# Altium PCB Smart_Umbrella.PcbDoc
Units mil, origin at the board's own origin, x right, y up, seen from the top; angles counter-clockwise.
Board outline 1377.95 x 2165.35 mil, 2 copper layers (Top Layer, Bottom Layer); 50 components, 39 nets, 170 pads, 17 vias.
Unrouted connection lines stored in the file: 1.
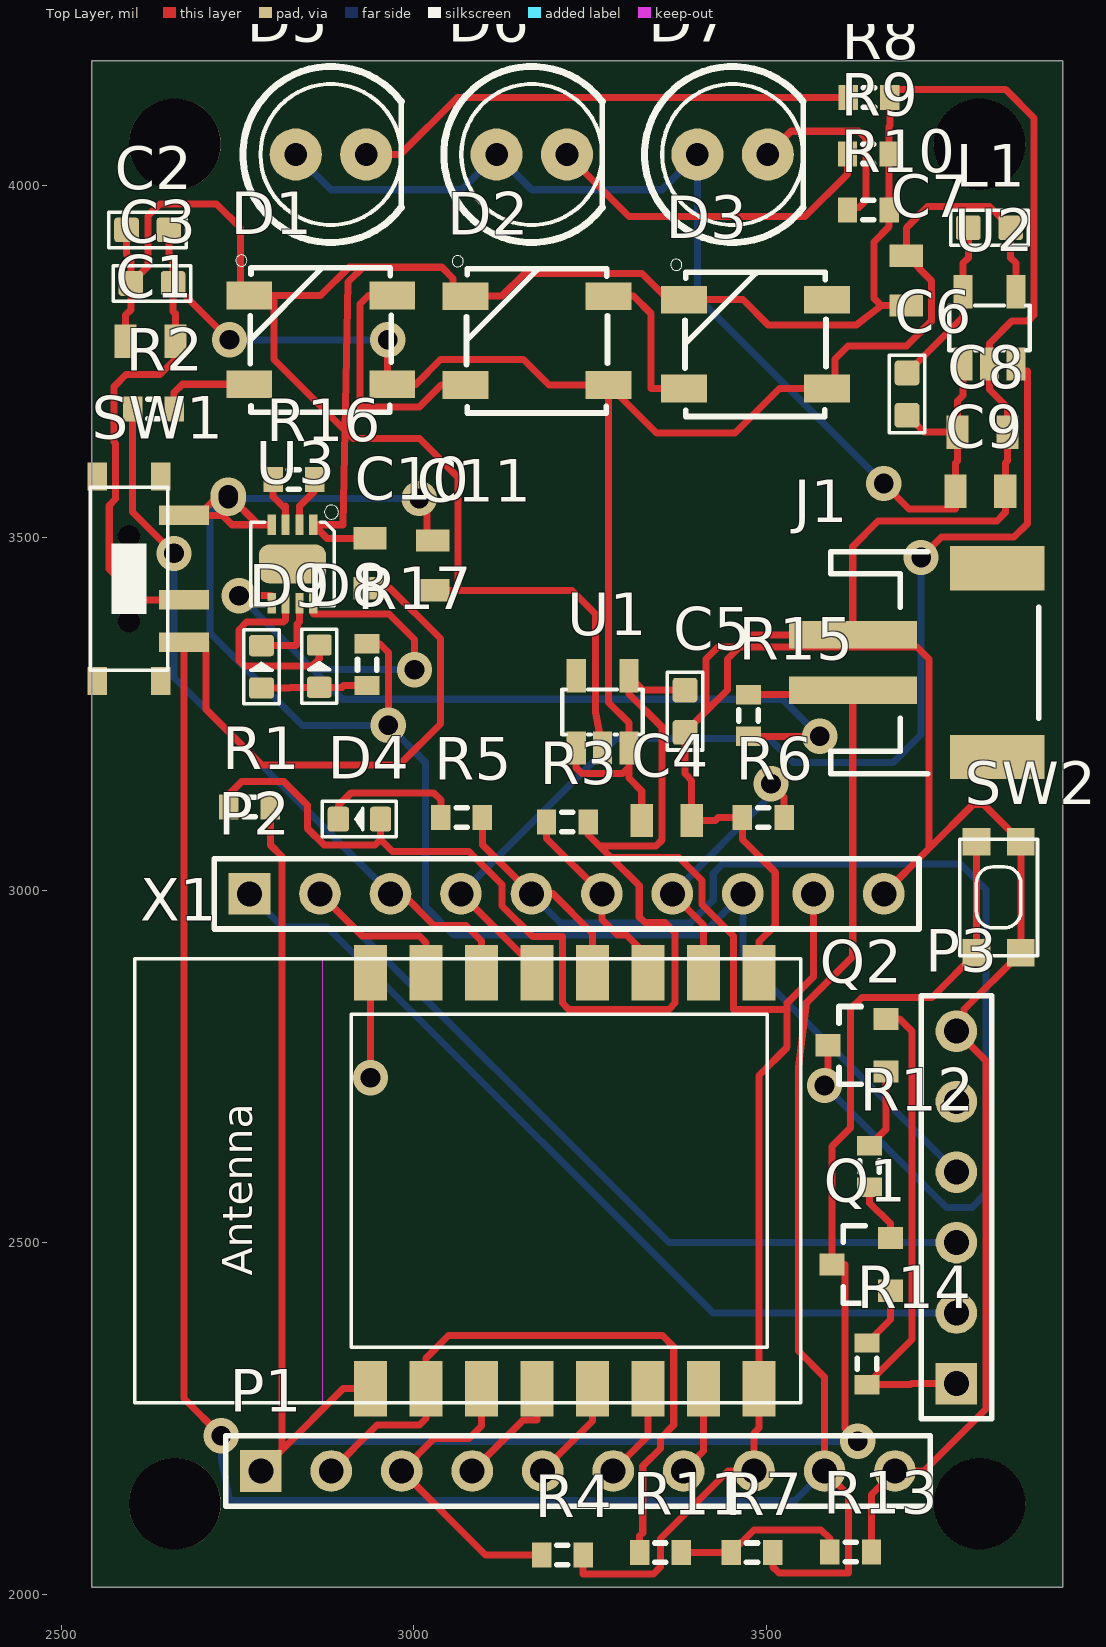
[diagram p0: Top Layer view]
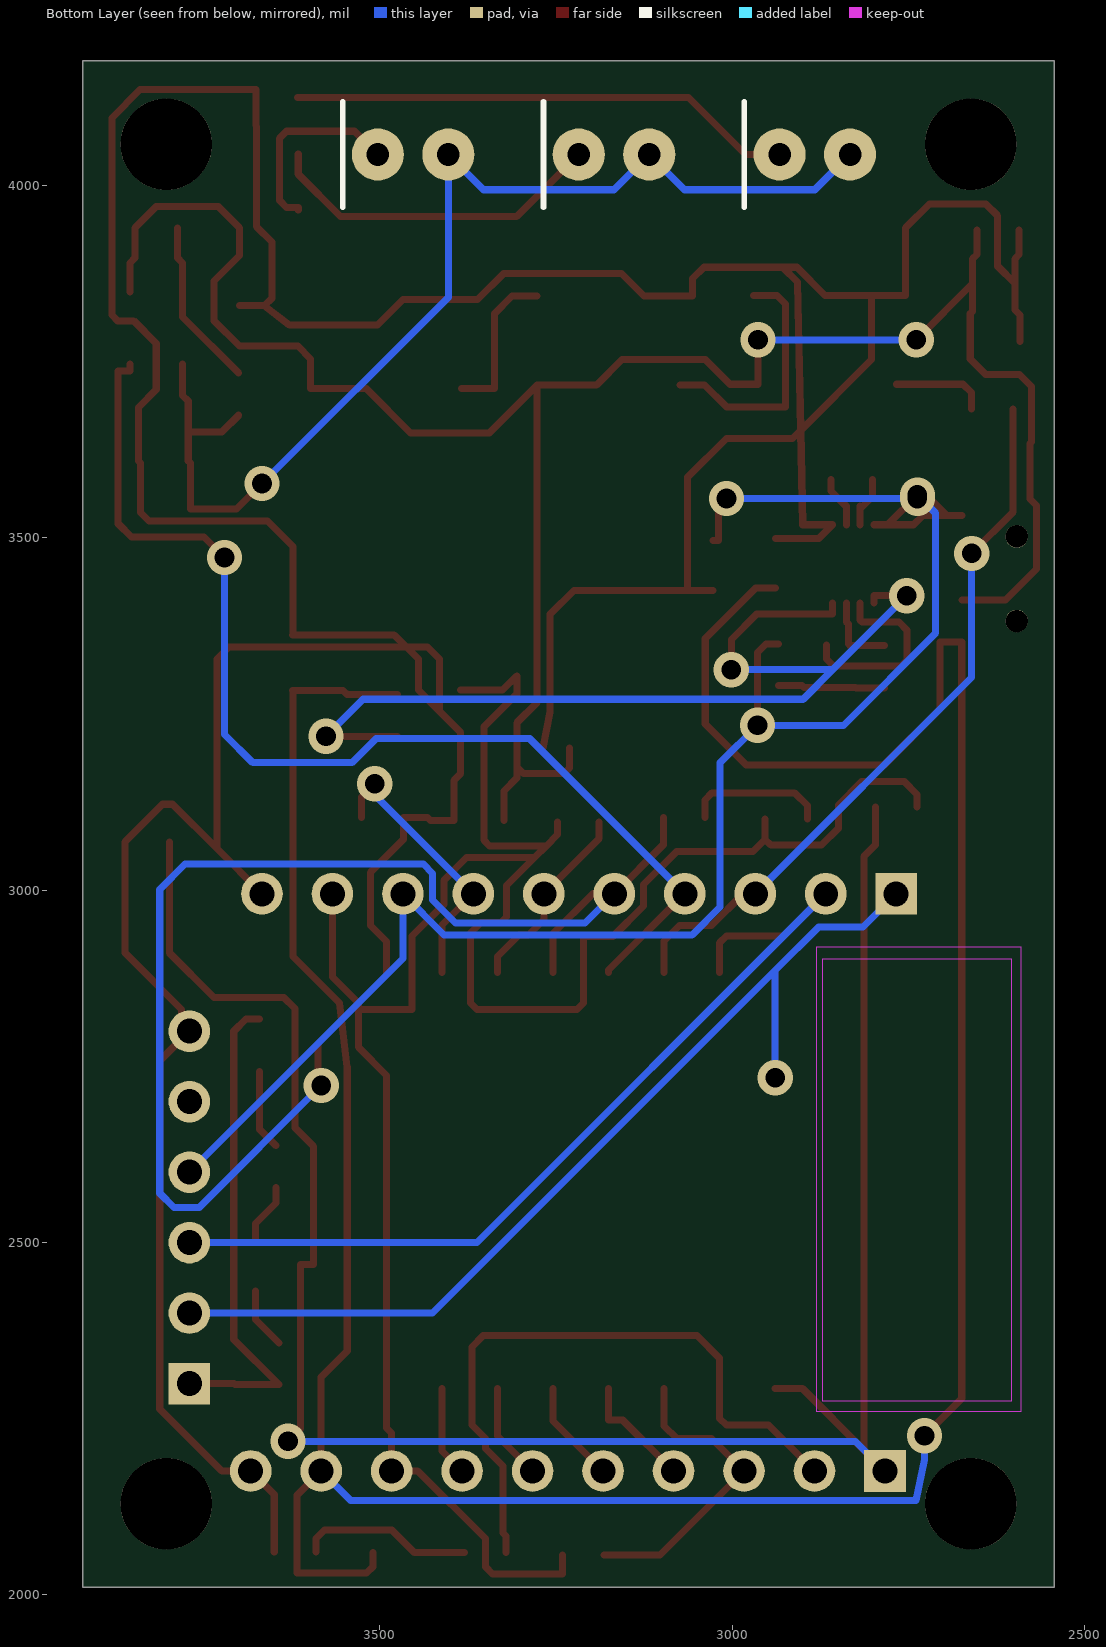
[diagram p1: Bottom Layer view, seen from below]

## Layer stack, top to bottom
Top Solder: solder mask 0.4, Solder Resist, Dk 3.5
Top Layer: signal copper 1.4
Dielectric 1: dielectric 12.6, FR-4, Dk 4.8
Bottom Layer: signal copper 1.4
Bottom Solder: solder mask 0.4, Solder Resist, Dk 3.5

## Board outline
2543,4176.68 2543,2011.32 3920.95,2011.32 3920.95,4176.68

## Design rules (kind name [scope] priority, off if disabled: settings)
Clearance "Schematic Clearance Constraint" [InComponent('U3')] p1: gap=10 except(7: Track-SMDPad SMDPad-SMDPad)
Clearance [All] p2: gap=7
PasteMaskExpansion [All] p1 off: expansion=0
PolygonConnect [All] p1: connectstyle=Relief reliefconductorwidth=10 reliefentries=4 polygonreliefangle="90 Angle" airgapwidth=10
RoomDefinition Smart_Umbrella [InComponentClass('Smart_Umbrella')] p1: confinementstyle=ConfineIn formatcopy=TRUE lockcomponents=FALSE outline 2446,1891 4025,1891 4025,4318 2446,4318
RoutingVias [All] p1: holewidth=28 width=50 viastyle="Through Hole" minholewidth=28 minwidth=50 maxholewidth=28 maxwidth=50
SolderMaskExpansion [All] p1 off: expansion=4
Width [All] p1: maxlimit=10 minlimit=8 preferedwidth=10
29 further rules are at their usual default settings.

## Components (designator, comment, footprint, x,y, rotation, side; value= is the part's Value field where it differs from the comment)
C1 "10µF" 0805 2626.57,3779 r180 top
C2 "1µF" C0603 2622.57,3937 r90 top
C3 "1µF" C0603 2628.57,3861 r90 top
C4 "0.1µF" 0805 3359,3099 r0 top
C5 "1µF" C0603 3385,3254 r180 top
C6 "2.2nF" C0603 3700,3704 r180 top
C7 "4.7µF" 0805 3699,3865 r270 top
C8 "22µF" 0805 3807,3650 r0 top
C9 "22µF" 0805 3804,3566 r0 top
C10 "4.7µF" 0805 2938,3464 r90 top
C11 "22µF" 0805 3027,3461 r270 top
D1 "WS2812B5050" WS2812B 2868,3781 r0 top
D2 "WS2812B5050" WS2812B 3175,3780 r0 top
D3 "WS2812B5050" WS2812B 3485,3775 r0 top
D4 "Red" LED-0603 2923,3101 r180 top
D5 "LED" LED_5MM 2882.54,4043.99 r0 top
D6 "LED" LED_5MM 3167.54,4043.99 r0 top
D7 "LED" LED_5MM 3452.54,4043.99 r0 top
D8 "Yellow" LED-0603 2866,3318 r90 top
D9 "Green" LED-0603 2784,3317 r90 top
J1 "JSTPH" JST-2-SMD 3769,3323 r270 top
L1 "6.8µH" L0603 3817,3940 r180 top
P1 "Header 10" HDR1X10 2783,2176 r0 top
P2 "Header 10" HDR1X10 2767,2995 r0 top
P3 "Header 6" HDR1X6 3770,2300 r90 top
Q1 "MMBT3904L" SOT23-3 3637,2469 r90 top
Q2 "MMBT3904L" SOT23-3 3631,2780 r90 top
R1 "Res3" J1-0603 2767,3118 r180 top
R2 "Res3" J1-0603 2630.57,3683 r0 top
R3 "Res3" J1-0603 3218,3097 r0 top
R4 "Res3" J1-0603 3211,2057 r0 top
R5 "Res3" J1-0603 3068,3103 r180 top
R6 "Res3" J1-0603 3496,3103 r0 top
R7 "Res3" J1-0603 3480,2060 r0 top
R8 "Res3" J1-0603 3646.04,4125 r180 top
R9 "Res3" J1-0603 3645,4045 r180 top
R10 "Res3" J1-0603 3645,3965 r180 top
R11 "Res3" J1-0603 3350,2060 r180 top
R12 "Res3" J1-0603 3647,2608 r90 top
R13 "Res3" J1-0603 3620,2061 r0 top
R14 "Res3" J1-0603 3643,2328 r90 top
R15 "Res3" J1-0603 3475,3248 r90 top
R16 "Res3" J1-0603 2830,3583 r0 top
R17 "Res3" J1-0603 2934,3320 r270 top
SW1 "MK-12C02" SW7-SMD-L6.7X2.7X3.2MM 2596,3442 r0 top
SW2 "DHT-4235A" KMR2 3830,2990 r270 top
U1 "XC6204B332MR" SOT-23-5 3268,3253 r0 top
U2 "ETA1036-50S2F" SOT-23-5 3817,3798 r0 top
U3 "CN3065" DFN8G-0.5-3X3MM 2828,3463 r180 top
X1 "ESP-12" ESP-12 3116,2588 r90 top

## Footprints (in the part's own frame and the unit in brackets; to place one, negate y for a bottom-side part, rotate by r counter-clockwise, add the part's x,y. Pads: shape width x height; smd on the part's side, far side on the other; paste and mask are expansions set on the pad)
0805 [mil]
  rect 31.5x47.24 smd: 1(-35.43,0) 2(35.43,0)
C0603 [mil]
  rrect25% 35x35 smd: 1(0,30) 2(0,-30)
  silkscreen extent -25,-55 25,55
DFN8G-0.5-3X3MM [mil]
  rect 11.81x28.62 smd: 1(-29.53,-55.65) 2(-9.84,-55.65) 3(9.84,-55.65) 4(29.53,-55.65) 5(29.53,55.65) 6(9.84,55.65) 7(-9.84,55.65) 8(-29.53,55.65)
  rrect50% 95x55 smd: HEAT(0,0)
  silkscreen extent -65,-84 59,59
ESP-12 [mm]
  rect 2x1.2 smd: 1(-7.5,4.5) 2(-7.5,2.5) 3(-7.5,0.5) 4(-7.5,-1.5) 5(-7.5,-3.5) 6(-7.5,-5.5) 7(-7.5,-7.5) 8(-7.5,-9.5) 9(7.5,-9.5) 10(7.5,-7.5) 11(7.5,-5.5) 12(7.5,-3.5) 13(7.5,-1.5) 14(7.5,0.5) 15(7.5,2.5) 16(7.5,4.5)
  Mechanical 8 keep-out region: -8,6 8,6 8,13 -8,13
  Mechanical 9 keep-out region: -8,6 8,6 8,13 -8,13
  silkscreen extent -8,-11 8,13
HDR1X6 [mm] "Connector; Header; 6 Position"
  rect 1.5x1.5 hole 0.9: 1(0,0)
  round 1.5 hole 0.9: 2(2.54,0) 3(5.08,0) 4(7.62,0) 5(10.16,0) 6(12.7,0)
  silkscreen extent -1.27,-1.27 13.97,1.27
HDR1X10 [mm] "Connector; Header; 10 Position"
  rect 1.5x1.5 hole 0.9: 1(0,0)
  round 1.5 hole 0.9: 2(2.54,0) 3(5.08,0) 4(7.62,0) 5(10.16,0) 6(12.7,0) 7(15.24,0) 8(17.78,0) 9(20.32,0) 10(22.86,0)
  silkscreen extent -1.27,-1.27 24.13,1.27
J1-0603 [mm] "Chip Resistor, Body 1.6x0.8mm, IPC High Density"
  rect 0.7x0.9 smd: 1(-0.75,0) 2(0.75,0)
  silkscreen extent -0.2,-0.35 0.2,0.35, body extent -0.85,-0.48 0.85,0.48, height 0.9
JST-2-SMD [mm]
  rect 1x4.6 smd: 1(-1,-3.7) 2(1,-3.7)
  rect 1.6x3.4 smd: NC1(-3.4,1.5) NC2(3.4,1.5)
  silkscreen extent -4,-4.5 4,3
KMR2 [mm]
  rect 1x1 smd: 1(2,0.8) 2(2,-0.8) 3(-2,0.8) 4(-2,-0.8)
  silkscreen extent -2.1,-1.4 2.1,1.4
L0603 [mil]
  rrect25% 35x35 smd: 1(-30,0) 2(30,0)
  silkscreen extent -55,-25 55,25
LED-0603 [mil]
  rrect25% 30x35 smd: +(-30,0) -(30,0)
  silkscreen extent -52,-25 52,25
LED_5MM [mil]
  round 74 hole 32: A(-50,0) K(50,0)
  silkscreen extent -125,-125 100,125
SOT23-3 [mil]
  rect 31.5x35.43 smd: 1(-37.4,-39.37) 2(37.4,-39.37) 3(0,43.31)
  silkscreen extent -55,-4 55,28, body extent -59,-29 59,29, height 35
SOT-23-5 [mil]
  rect 27.17x47.24 smd: 1(-37.4,-51.19) 2(0,-51.19) 3(37.4,-51.19) 4(37.4,51.19) 5(-37.4,51.19)
  silkscreen extent -57,-32 57,32
SW7-SMD-L6.7X2.7X3.2MM [mil]
  round 32 hole 32: 1(0,-60) 1(0,60)
  rect 70.87x27.56 smd: A(77.87,90) B(77.87,-90) COM(77.87,-30)
  rect 27.56x40 smd: SS1(-45.28,-145) SS2(45.28,-145) SS3(45.28,145) SS4(-45.28,145)
  silkscreen extent -55,-130 55,130
WS2812B [mil]
  rect 65x39.37 smd: 1(101.46,-62.99) 2(101.46,62.99) 3(-101.46,62.99) 4(-101.46,-62.99)
  silkscreen extent -120,-103 100,120

## Part data
C1 C4 C7 C8 C9 C10 C11: library part 10UF-0805-10V-10%
C2 C3 C5: library part CERAMIC-1UF-25V-10%-X7R(0603)
C6: library part CERAMIC-2.2NF-50V-10%-X7R(0603)
D4: library part LED-0603
D5 D6 D7: library part LED5MM
D8: library part SMD-LED-CLEAR-YELLOW(0603)
D9: library part SMD-LED-CLEAR-GREEN(0603)
J1: library part JST_2MM_MALE
L1: library part INDUCTOR/FERRITE-BEAD-0603
P1 P2: "Header, 10-Pin"
P3: "Header, 6-Pin"
Q1 Q2: library part TRANSISTOR_NPNSOT23-3, "Transistor NPNBJT configuration in SOT23 package. MMBT2222 is the common NPN we use. Double check BCE configuration again layout."
R1 R2 R3 R4 R5 R6 R7 R8 R9 R10 R11 R12 R13 R14 R15 R16 R17: "Resistor"
SW1: library part SMD-TOGGLE-SWITCH-ON-ON(3+4P-6.7X2.7MM)
SW2: library part SPST_TACT-KMR2
U1: library part PMIC-LDO-XC6204B332MR(SOT23-5)
U2: library part PMIC-ETA1036-50S2F-T(SOT23-5)
U3: library part PMIC-CN3065(DFN8)

## Free pads (board coordinates)
  round 129.92 hole 129.92: 1(2661.11,2129.43) 1(2661.11,4058.57) 1(3802.84,2129.43) 1(3802.84,4058.57)

## Via types
v1: diameter 50, hole 28, Top Layer to Bottom Layer, 17 vias

## Nets (pads, with @x,y where several pads share a name; then routed paths per layer and width w, separated by ;. In a path a pad name is that pad's centre, name@x,y a point inside that pad or via, vN(x,y) a via of type N, cw(c..) or ccw(c..) an arc to the next point about the centre after c; other vN are vias at no path point)
3.3V: C5.2 D4.+ P1.8 P2.9 R1.2 R3.2 R4.2 U1.4 X1.8 | length 3308.9
  Top Layer w10: R1.2 2737.47,3136 2755.47,3154 2816,3154 2849,3121 2849,3088 2873,3064 2945,3064 2953,3072 ; D4.+ 2953,3072 ; R4.2 3240.53,2030 3340,2030 3350,2040 3350,2080 3446,2176 P1.8 3483,2230 3490.02,2237.02 X1.8 3490.02,2737.32 3530,2777.3 3530,2831 ; R3.2 3247.53,3078.94 3263.47,3063 ; C5.2 3325.59,3284 U1.4 3305.4,3278.6 3352,3232 3352,3071 3344,3063 3263.47,3063 ; P2.9 3567,2877 3530,2840 3530,2831 ; 2953,3072 2970,3055 3078.47,3055 3125.47,3008 3125.47,2977.8 3168.62,2934.65 3211,2934.65 3211,2840 3220,2831 3362,2831 3371,2840 3371,2939.5 3356.5,2954 3328,2954 3320,2962 3320,3006.47 3280.09,3046.38 ; 3263.47,3063 3280.09,3046.38 ; 3280.09,3046.38 3376.62,3046.38 3409,3014 3409,2980 3454,2935 3454,2831 3530,2831
ADC: P1.2 R11.2 X1.2 | length 934.3
  Top Layer w10: P1.2 2948,2241 3008,2241 3017.57,2250.57 X1.2 3017.57,2336 3049.57,2368 3353,2368 3369,2352 3369,2241 3350,2222 3350,2208 3325,2183 3325,2088 3320.47,2083.47 R11.2
CH_PD: P1.3 R4.1 X1.3 | length 440.3
  Top Layer w10: X1.3 3096.31,2240 3078.31,2222 3029,2222 P1.3 3102,2057 R4.1
CTS: P3.5
DTR: P3.1 Q2.2 R14.1 | length 699.5
  Top Layer w10: Q2.2 3689.6,2817.4 3707,2800 3707,2362.47 R14.1 3705,2298.47 3706.53,2300 P3.1
GND: C1.2 C2.1 C3.1 C4.2 C5.1 C7.2 C8.2 C9.2 C10.2 C11.2 D1.3 D2.3 D3.3 J1.1 P1.10 P2.10 P3.6 R6.1 R8.1 R9.1 R10.1 R13.2 R16.1 SW2.1 SW2.3 U1.2 U2.2 U3.1 U3.3 X1.9 | length 7552
  Top Layer w10: C1.2 2591.14,3816 2598.57,3823.43 C3.1 ; C2.1 2592.57,3902 2598.57,3896 C3.1 ; R16.1 2800.47,3558.69 2818.16,3541 ; U3.3 2818.16,3541 ; 2818.16,3545 2818.16,3541 ; C10.2 2876.75,3499.43 U3.1 2899.65,3518.65 2902.51,3652.49 ; C11.2 3063,3425.57 ; U1.2 3258,3253 3258,3392 3224.43,3425.57 3063,3425.57 ; X1.9 3490.02,2927.02 3513,2950 3513,3025.47 3466.47,3072 R6.1 3432,3103 3428,3099 C4.2 3394.43,3156 3385,3165.43 C5.1 3415,3254 ; J1.1 J1.1@3623,3362.37 ; R13.2 3649.53,2142.53 P1.10 3724,2176 3812,2264 3812,2758 P3.6 3781,2800 3781,2830.76 SW2.1 SW2.3 3808.24,3122 3794,3122 3731,3059 ; P2.10 3731,3059 ; C7.2 3663.43,3829.57 ; C3.1 2623,3885.43 2623,3957 2640,3974 2720,3974 2754,3940 2754,3843.99 D1.3 2802.02,3843.99 ; 2802.02,3843.99 2868,3843.99 2908.01,3884 2928,3884 ; 2802.02,3843.99 2802.02,3752.98 2902.51,3652.49 ; 2902.51,3652.49 2914,3641 3008,3641 3063,3586 3063,3425.57 ; 2902.51,3652.49 2907,3863 2928,3884 ; 2928,3884 3040,3884 3056,3868 3056,3842.99 D2.3 3124.99,3842.99 3157,3875 3323.99,3875 3361,3837.99 D3.3 3467,3837.99 3502.99,3802 3628,3802 3663.43,3829.57 ; 3415,3254 3415,3328 3432,3345 3462,3345 ; 3415,3254 3445,3284 3445,3328 3462,3345 ; 3462,3345 3479.37,3362.37 J1.1@3623,3362.37 ; 3462,3345 3714,3345 3731,3328 3731,3059 ; J1.1@3623,3362.37 3623,3488 3659,3524 3827.43,3524 3839.43,3536 C9.2 3839.43,3606 3842.43,3609 C8.2 3842.43,3685 3817,3710.43 U2.2 3817,3776 3849,3808 3872,3808 3880,3816 3880,4096 3840,4136 3675.57,4136 R8.1 3675.57,4085.04 3674.53,4084 R9.1 R10.1 3674.53,3941.53 3653,3920 3653,3840 3663.43,3829.57
GPIO0: P2.5 Q2.3 R5.1 X1.12 | length 1835.1
  Top Layer w10: R5.1 3097.53,3064.47 P2.5 3197.39,2995 3253.8,2938.59 X1.12 ; v1(3583,2723) 3587.69,2727.69 Q2.3
  Bottom Layer w10: P2.5 3208.53,2953.47 3392.47,2953.47 3425,2986 3425,3024 3438,3037 3776,3037 3812,3001 3812,2570 3792,2550 3756,2550 v1(3583,2723)
GPIO2: P2.6 R3.1 X1.11 | length 281.1
  Top Layer w10: R3.1 3188.47,3073.53 P2.6 3267,2958.39 3288.92,2936.47 3302.07,2936.47 3332.54,2906 X1.11
GPIO4/SDA: P2.4 U2.3 X1.13 | length 1596.6
  Top Layer w10: P2.4 3175.06,2886.94 X1.13 ; v1(3720,3472) 3749,3501 3852,3501 3871,3520 3871,3737 3854.4,3737 U2.3
  Bottom Layer w10: P2.4 3287,3215 3505,3215 3539,3181 3680,3181 3720,3221 v1(3720,3472)
GPIO5/SCL: P2.3 R2.1 X1.14 | length 1041.4
  Top Layer w10: R2.1 2601.04,3536.96 v1(2660,3478) ; P2.3 2984,2995 3029,2950 3074.31,2950 3096.31,2928 X1.14
  Bottom Layer w10: v1(2660,3478) 2660,3302 P2.3
GPIO12/MISO: P1.6 X1.6 | length 137.2
  Top Layer w10: P1.6 3332.54,2225.54 X1.6
GPIO13/MOSI: P1.7 X1.7 | length 128.4
  Top Layer w10: P1.7 3411.28,2204.28 X1.7
GPIO14/SCK: P1.5 X1.5 | length 146
  Top Layer w10: P1.5 3253.8,2246.8 X1.5
GPIO15: P2.7 R6.2 X1.10 | length 399.7
  Top Layer w10: P2.7 3411.28,2950.72 X1.10 ; v1(3507,3151) 3525.53,3132.47 R6.2
  Bottom Layer w10: P2.7 3507,3135 v1(3507,3151)
GPIO16: P1.4 X1.4 | length 166.6
  Top Layer w10: P1.4 3155,2248 3175.06,2248 X1.4
NetC6_1: C6.1 C8.1 C9.1 D5.A D6.A D7.A U2.1 | length 1637.7
  Top Layer w10: v1(3667,3577) 3703,3541 3768.57,3541 C9.1 3768.57,3606 3771.57,3609 C8.1 ; C6.1 3724,3650 C8.1 ; U2.1 3779.6,3702.03 3771.57,3694 C8.1
  Bottom Layer w10: D5.A 2882.53,3994 3067.55,3994 D6.A 3167.53,3994 3352.55,3994 D7.A 3402.54,3841.46 v1(3667,3577)
NetC6_2: C6.2 L1.2 U2.5 | length 242
  Top Layer w10: C6.2 3779.6,3813.6 U2.5 3779.6,3890 3787,3897.4 L1.2
NetD1_2: D1.2 D2.4 | length 358.8
  Top Layer w10: D1.2 2935.99,3843.99 2924,3832 2924,3686 3008,3686 3039.01,3717.01 D2.4
NetD1_4: D1.4 R2.2 | length 134.5
  Top Layer w10: R2.2 2660.1,3706.11 2672,3718.01 D1.4
NetD2_2: D2.2 D3.4 | length 223.4
  Top Layer w10: D2.2 3312,3842.99 3336.99,3818 3336.99,3712.01 D3.4
NetD4_-: D4.- R5.2 | length 201.3
  Top Layer w10: D4.- 2893,3120 2911.3,3138.3 3028.17,3138.3 3038.47,3128 R5.2
NetD5_K: D5.K R8.2 | length 717.5
  Top Layer w10: D5.K 2980.99,4043.99 3062,4125 R8.2
NetD6_K: D6.K R9.2 | length 488.2
  Top Layer w10: D6.K 3305.53,3956 3555.47,3956 3615.47,4016 R9.2
NetD7_K: D7.K R10.2 | length 279.9
  Top Layer w10: D7.K 3535.55,4077 3632,4077 3642,4067 3642,3979 3632,3969 3615.47,3969 R10.2
NetD8_+: D8.+ D9.+ R17.2 | length 151.4
  Top Layer w10: D9.+ 2824,3287 2825,3288 D8.+ 2898,3288 2900.47,3290.47 R17.2
NetD8_-: D8.- U3.6 | length 280.9
  Top Layer w10: U3.6 2818.16,3383.16 2815.37,3380.37 2762.96,3380.37 2752,3369.41 2752,3326 2760,3318 2856,3318 2866,3328 D8.-
NetD9_-: D9.- U3.7 | length 111
  Top Layer w10: D9.- 2832.38,3347 2834.73,3349.35 2834.73,3377.89 2837.84,3381 U3.7
NetQ1_1: Q1.1 R14.2 | length 87.9
  Top Layer w10: R14.2 3676.37,2390.9 Q1.1
NetQ2_1: Q2.1 R12.2 | length 114.8
  Top Layer w10: R12.2 3670.37,2660.9 Q2.1
NetR7_1: R7.1 R11.1 R13.1 | length 248.4
  Top Layer w10: R11.1 R7.1 3482.77,2092.29 3578.18,2092.29 3590.47,2080 R13.1
NetR15_1: R15.1 U3.5 U3.8 | length 1425.5
  Top Layer w10: v1(2752,3418) 2798.47,3418 U3.5 ; U3.8 2857.53,3392 2965,3392 3001,3356 v1(3001,3313) ; R15.1 v1(3576,3218.47)
  Bottom Layer w10: v1(2752,3418) 2857,3313 ; v1(3001,3313) 2857,3313 ; v1(3576,3218.47) 3523.47,3271 2899,3271 2857,3313
NetR16_2: R16.2 U3.2 | length 73.3
  Top Layer w10: U3.2 2837.84,3544.84 2859.53,3566.53 R16.2
RESET: P1.1 Q1.3 R1.1 SW2.2 SW2.4 X1.1 | length 3006.9
  Top Layer w10: P1.1 2813,2206 ; R1.1 2796.53,3064.47 2813,3048 2813,2206 ; X1.1 2899.72,2292.72 2813,2206 ; v1(3630,2218) 3612,2236 3612,2469 Q1.3 3593.69,2636.69 3620,2663 3620,2832 3636,2848 3735.24,2848 SW2.2 SW2.4
  Bottom Layer w10: P1.1 2825,2218 v1(3630,2218)
RTS: Q1.2 R12.1 | length 84.2
  Top Layer w10: R12.1 3647,2556.37 3676.37,2527 Q1.2
RXD: P2.2 P3.3 X1.15 | length 1329.6
  Top Layer w10: P2.2 2927,2935 3008,2935 3017.57,2925.43 X1.15
  Bottom Layer w10: P2.2 3362,2500 P3.3
TXD: P2.1 P3.2 X1.16 | length 1550.9
  Top Layer w10: v1(2938.83,2734) X1.16
  Bottom Layer w10: P2.1 2814,2948 2877,2948 2938.83,2886.17 ; v1(2938.83,2734) 2938.83,2886.17 ; P3.2 3425,2400 2938.83,2886.17
VBAT: C10.1 J1.2 P1.9 R7.2 R15.2 SW1.B | length 4461.2
  Top Layer w10: SW1.B SW1.B@2674,3352 ; v1(2727,2226) 2674,2279 SW1.B@2674,3352 ; C10.1 2966.43,3428.57 3038,3357 3038,3236 2980,3178 2784,3178 2705,3257 2705,3352 SW1.B@2674,3352 ; R15.2 3546,3277.53 3552.1,3283.63 J1.2@3623,3283.63 ; R7.2 3509.53,2040 3518.53,2031 3617,2031 3617,2142 P1.9 3583,2309 3546,2346 3546,2749.3 3557,2840 3623,2906 J1.2@3623,3283.63 ; J1.2 J1.2@3623,3283.63
  Bottom Layer w10: v1(2727,2226) 2727,2192 2739,2134 3541,2134 P1.9
VBUS: C11.1 P2.8 P3.4 R17.1 SW1.A U3.4 | length 2528.7
  Top Layer w10: SW1.A SW1.A@2695,3532 ; v1(2737,3556) 2719,3556 SW1.A@2695,3532 ; v1(2737,3561) 2779.35,3518.65 ; U3.4 2779.35,3518.65 ; R17.1 2952,3349.53 2964,3337.53 v1(2964,3234) ; v1(3008,3556) 3019,3545 3019,3496.43 C11.1 ; SW1.A@2695,3532 2729,3532 2742.35,3518.65 2779.35,3518.65
  Bottom Layer w10: v1(2737,3556) v1(3008,3556) ; v1(2737,3561) 2711,3535 2711,3365 2842,3234 v1(2964,3234) 3017,3181 3017,2976 3056.53,2936.47 3408.47,2936.47 P2.8 3467,2903 P3.4
VIN: C1.1 C2.2 C3.2 C4.1 C7.1 D1.1 D2.1 D3.1 L1.1 SW1.COM U1.1 U1.3 U2.4 | length 3159.9
  Top Layer w10: C2.2 2652.57,3902 2658.57,3896 C3.2 ; SW1.COM 2612,3412 2568,3456 2568,3546 2577,3555 2577,3634 2575,3636 2575,3715 2592,3732 2640,3732 2662,3754 C1.1 2662,3818 2658.57,3821.43 C3.2 ; v1(2738.57,3781) C3.2 ; v1(2963,3781) 2963,3718.01 D1.1 3003.01,3718.01 3038,3753 3156.01,3753 3192,3717.01 D2.1 ; U1.1 3230.6,3173.4 3238.6,3165.4 3296,3165.4 3305.4,3174.8 ; C4.1 3323.57,3141 3305.4,3159.17 3305.4,3174.8 ; U2.4 3854.4,3890 3847,3897.4 L1.1 3817,3970 3729,3970 3699,3940 C7.1 3735,3864.43 3735,3808 3699,3772 3616,3772 3598,3754 3598,3712.01 D3.1 3519.01,3712.01 3456,3649 3344.47,3649 D2.1 ; D2.1 3276.46,3266.54 3305.4,3237.6 U1.3 3305.4,3174.8
  Bottom Layer w10: v1(2738.57,3781) v1(2963,3781)
pads on no net: D3.2 J1.NC1 J1.NC2 SW1.1 SW1.SS1 SW1.SS2 SW1.SS3 SW1.SS4 U1.5 U3.HEAT

## Keep-outs
Bottom Layer:
  region: 2590,2260 2610,2260 2880,2260 2880,2920 2590,2920
Keep-Out Layer:
  rectangle: 2604,2275 2871,2903

## Text inside footprints (layer, text, board x,y; h text height)
X1: Top Overlay "Antenna" at 2771,2453 h42.5 r90